# Altium PCB Elevador_TH.PcbDoc
Units mm, origin at the board's own origin, x right, y up, seen from the top; angles counter-clockwise.
Board outline 30.7 x 29.6 mm, 2 copper layers (Top Layer, Bottom Layer), stack 2.103 mm thick; 11 components, 8 nets, 27 pads, 10 vias.
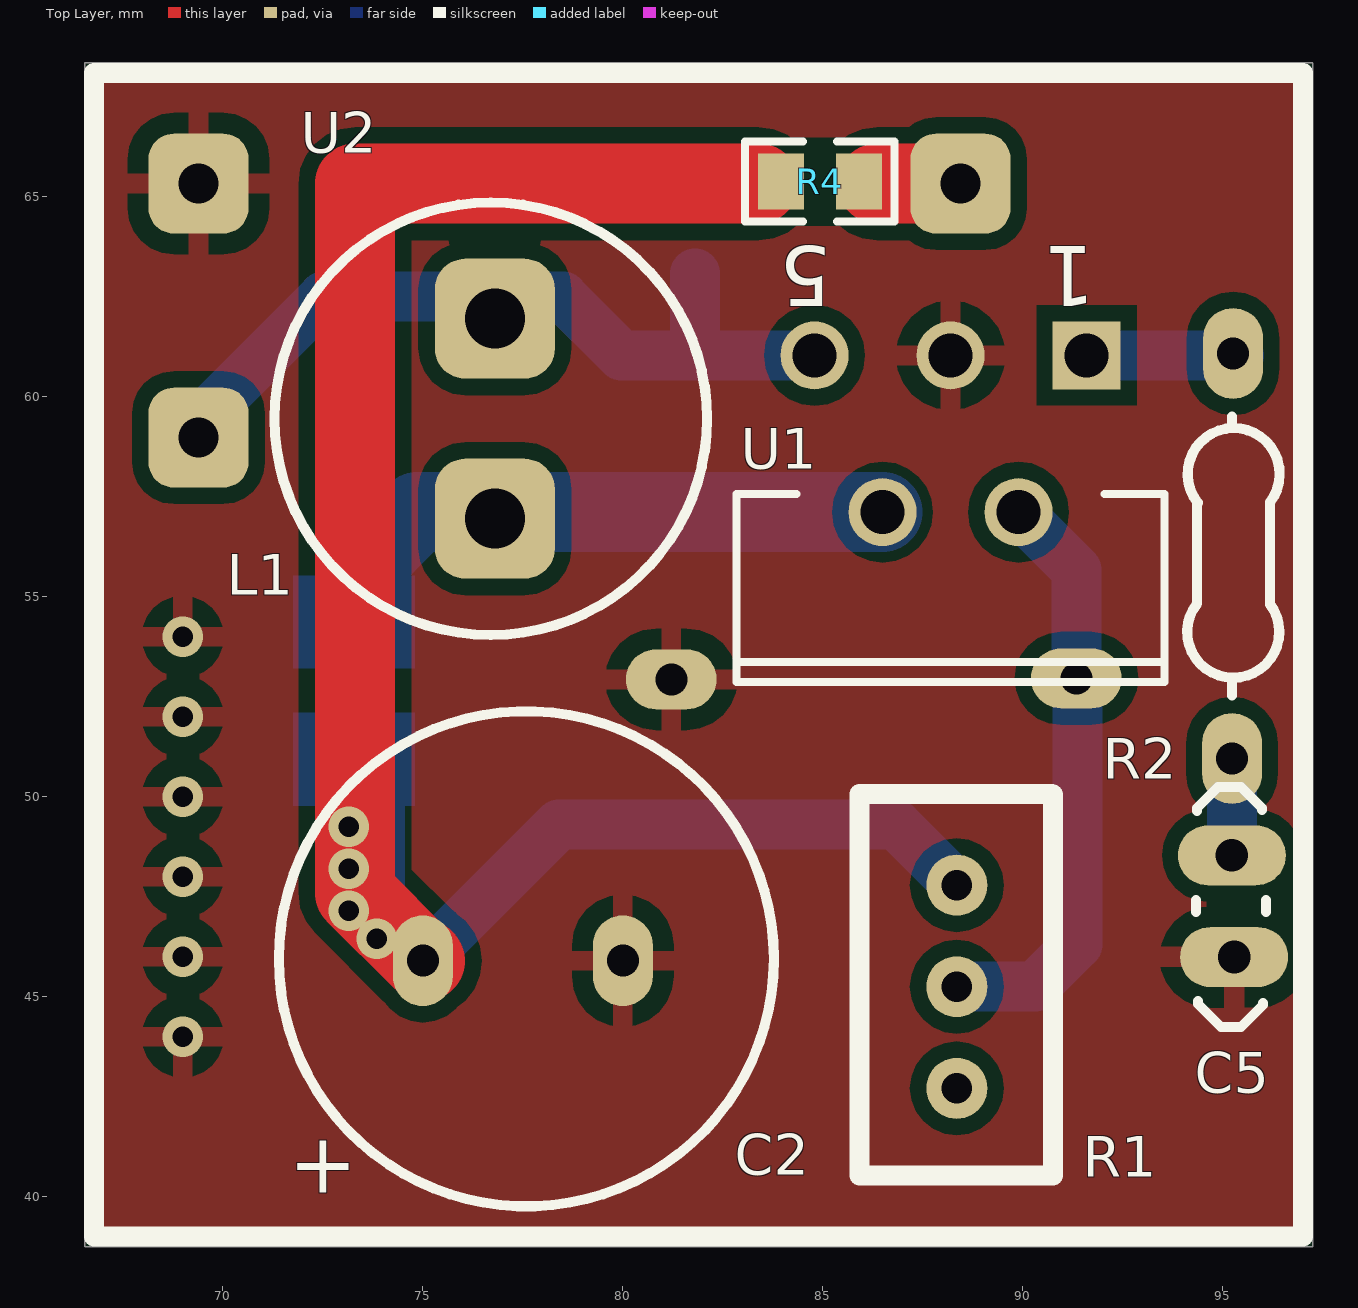
[diagram p0: Top Layer view]
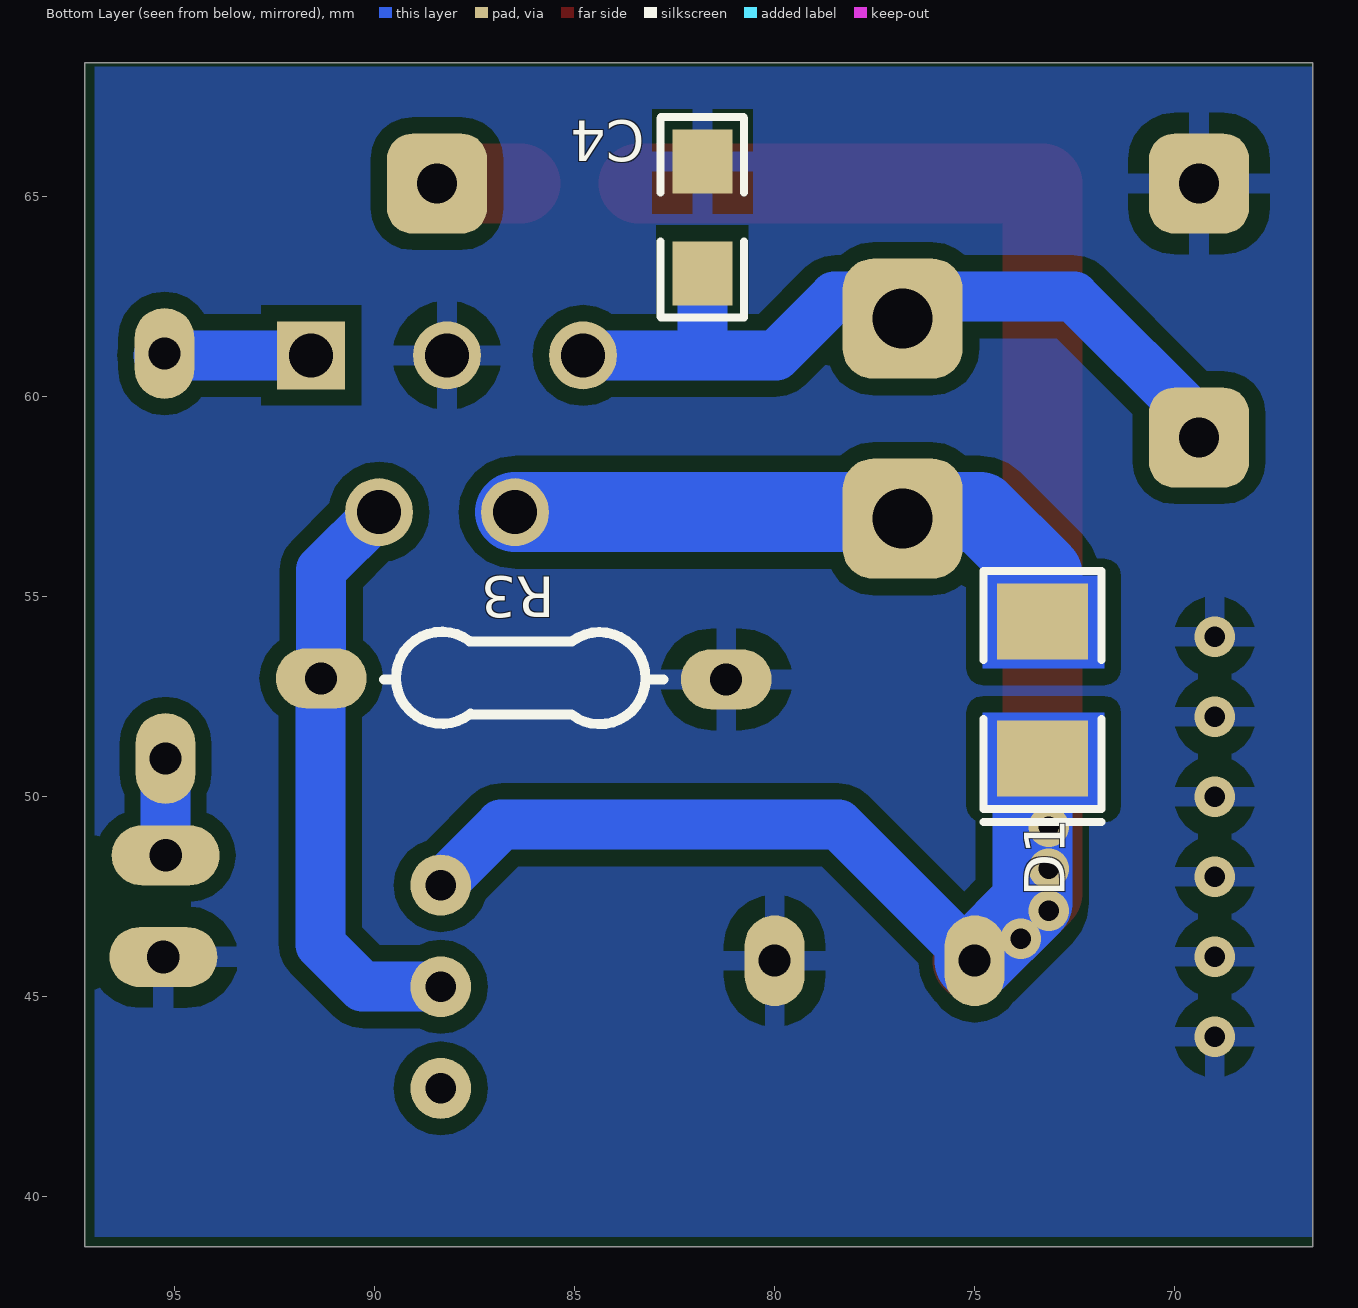
[diagram p1: Bottom Layer view, seen from below]
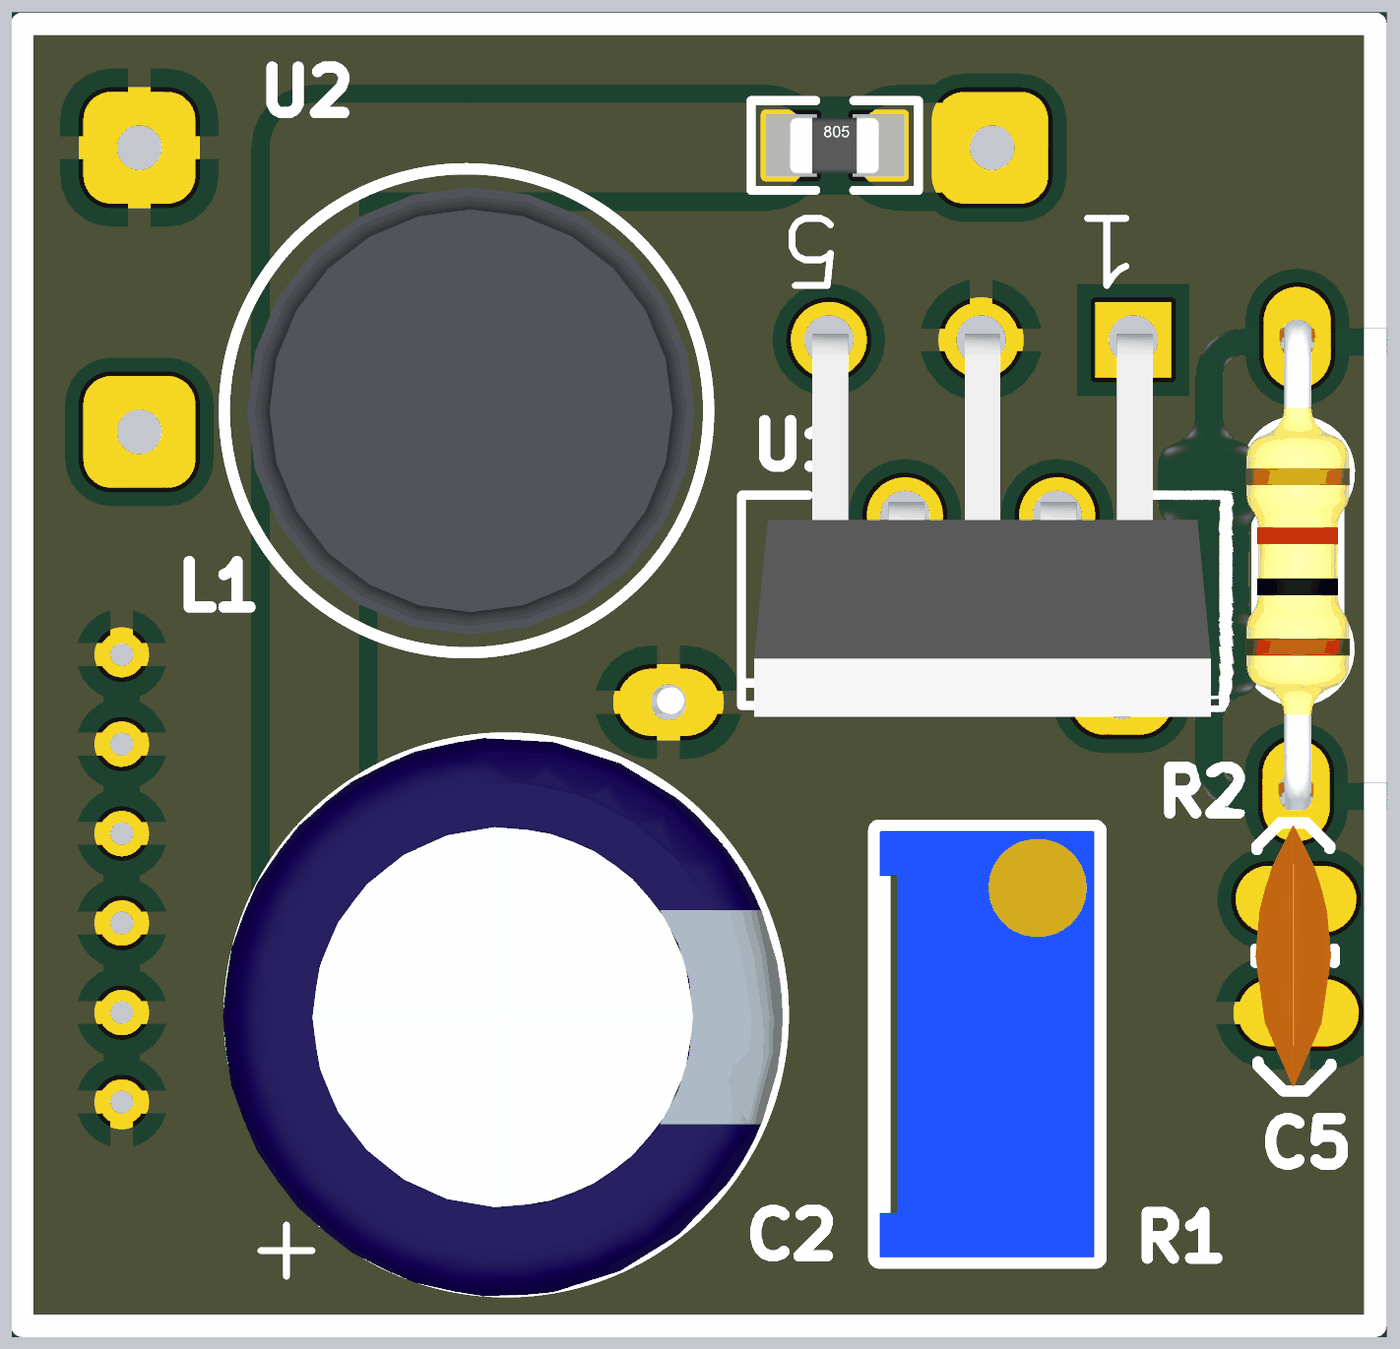
[diagram p2: 3D render of the assembled board from above, using the file's embedded part models]

## Layer stack, top to bottom
Top Solder: solder mask 0.0102, Solder Resist, Dk 3.5
Top Layer: signal copper 0.0356
Dielectric 1: dielectric 2.032, FR-4, Dk 4.8
Bottom Layer: signal copper 0.0356
Bottom Solder: solder mask 0.0102, Solder Resist, Dk 3.5

## Board outline
66.548,38.75 66.548,68.35 97.25,68.35 97.25,38.75

## Design rules (kind name [scope] priority, off if disabled: settings)
Clearance Clearance_Poly [InNet('GND')] p1: gap=0.4
Clearance [All] p2: gap=0.1
ComponentClearance [All] p1: gap=0 collisioncheckmode=3 verticalgap=0 showdistances=FALSE
HoleToHoleClearance [All] p1: gap=0 allowstackedmicrovias=TRUE
MinimumSolderMaskSliver [All] p1: minsoldermaskwidth=0
PolygonConnect [All] p1: connectstyle=Relief reliefconductorwidth=0.508 reliefentries=4 polygonreliefangle="90 Angle" airgapwidth=0.508
RoutingVias [All] p1: holewidth=0.711 width=1.27 viastyle="Through Hole" minholewidth=0.711 minwidth=1.27 maxholewidth=0.711 maxwidth=1.27
SilkToSilkClearance [All] p1: silktosilkclearance=0
SilkToSolderMaskClearance [IsPad] p1: minsilkscreentomaskgap=0 clearancetoexposedcopper=TRUE
SolderMaskExpansion [All] p1: expansion=0.102
Width [All] p1: maxlimit=3 minlimit=0.5 preferedwidth=1
25 further rules are at their usual default settings.

## Classes and differential pairs
component class Elevador: C2 C4 C5 D1 L1 R1 R2 R3 U1

## Components (designator, comment, footprint, x,y, rotation, side; value= is the part's Value field where it differs from the comment)
C2 "> 400uF" "C 12.5 X 25" 77.5,45.9 r0 top
C4 "100nF" "C 1206" 83.718,62.738 r270 bottom
C5 "330nF" "C Lenteja" 95.281,47.269 r90 top
D1 "DIODO" "D 3528" 73.308,52.672 r270 bottom
L1 "100uH" "L SW TH" 76.8,61.95 r270 top
R1 "10k" BOURNS-3596W 88.35,45.25 r90 top
R2 "2.2k" "R THRU" 95.256,56.083 r90 top
R3 "1k" "R THRU" 86.337,52.959 r0 bottom
R4 "1R" "R 0805" 88.85,68.7 r0 top
U1 "UC2577T-ADJ" "TO220 5" 88.496,55.169 r180 top
U2 "PTN04050CAD" PTN04050 67.361,53.645 r0 top

## Footprints (in the part's own frame and the unit in brackets; to place one, negate y for a bottom-side part, rotate by r counter-clockwise, add the part's x,y. Pads: shape width x height; smd on the part's side, far side on the other; paste and mask are expansions set on the pad)
BOURNS-3596W [mil]
  round 60 hole 30: 1(100,0) 2(0,0) 3(-100,0)
  silkscreen extent -186,-94 190,96, body extent -186,-93 189,95, height 455
"C 12.5 X 25" [mm] "Capacitor  Electrolitico Radial 12.5mm diametro  x 25mm de altura (5mm entre pines)"
  oval 1.5x2.27 hole 0.8: 1(-2.5,0) 2(2.5,0)
  silkscreen extent -6.1,-6.14 6.28,6.23, body extent -6.24,-6.25 6.26,6.25, height 25.5
"C 1206" [mm]
  rect 1.6x1.5 smd: 1(-3.144,1.911) 2(-0.344,1.911)
  silkscreen extent -4.25,0.86 0.75,2.95, body extent -3.28,1.11 -0.08,2.71, height 0.77
"C Lenteja" [mm] "Capacitor cerámico lenteja"
  oval 1.5x2.7 hole 0.813: 1(-1.276,0) 2(1.264,0.054)
  silkscreen extent -3.03,-0.8 2.98,0.95, body extent -2.93,-0.74 2.91,0.96, height 6.92
"D 3528" [mm]
  rect 1.9x2.28 smd: 1(-1.715,0) 2(1.715,0)
  silkscreen extent -2.98,-1.48 3.3,1.48
"L SW TH" [mm]
  rrect50% 3x3 hole 1.5: 1(0,0) 2(5,0)
  silkscreen extent -2.91,-5.51 7.91,5.31, body extent -2.5,-5 7.5,5, height 11.63
PTN04050 [mm] "DC Boost de texas instr."
  rrect50% 2.5x2.5 hole 1: 1(2.032,11.684) 2(2.032,5.334) 4(21.082,11.684)
  silkscreen extent -0.58,-14.64 29.64,14.45
"R 0805" [mm]
  rect 1.15x1.4 smd: 1(-4.901,-3.321) 2(-2.946,-3.321)
  silkscreen extent -5.79,-4.32 -2.06,-2.32, body extent -4.93,-3.95 -2.93,-2.7, height 0.78
"R THRU" [mm] "RESISTENCIA DE 1/4 W DE 1K OHM"
  oval 2.27x1.5 hole 0.8: 1(-5.125,0.025) 2(5,0)
  silkscreen extent -3.55,-1.17 3.42,1.14, body extent -5.56,-2.35 5.38,3.13, height 2.93
"TO220 5" [mm]
  rect 1.7x1.7 hole 1.1: 1(-3.097,-5.865)
  round 1.7 hole 1.1: 2(-1.397,-1.945) 3(0.303,-5.865) 4(2.003,-1.945) 5(3.703,-5.865)
  silkscreen extent -5.05,-2.4 5.65,2.3, body extent -4.83,-6 5.37,2.56, height 22

## Part data
C2: library part "C POL", "Capacitor polarizado."
C4 C5: library part C, "Capacitor"
L1: library part L, "Inductor"
R1: library part 3296W-1-502, "TRIMMER 5K OHM 0.5W PC PIN"
R2 R3 R4: library part R, "Resistencia"
U1: "IC REG MULTI CONFIG ADJ 3A TO220"
U2: "REG SW 5-15V 2.4A HORZ T/H"

## Via types
v1: diameter 1.016, hole 0.508, Top Layer to Bottom Layer, 10 vias

## Nets (pads, with @x,y where several pads share a name; then routed paths per layer and width w, separated by ;. In a path a pad name is that pad's centre, name@x,y a point inside that pad or via, vN(x,y) a via of type N, cw(c..) or ccw(c..) an arc to the next point about the centre after c; other vN are vias at no path point)
+VIN: C4.2 L1.1 U1.5 U2.2 | length 19.7
  Bottom Layer w1.25: U2.2 69.393,59.371 72.522,62.5 78.5,62.5 79.966,61.034 U1.5 ; 81.807,61.047 C4.2
+VOUT: R4.2 U2.4 | length 2.1
  Top Layer w2: R4.2@86.35,65.329 U2.4
GND: C2.2 C4.1 C5.1 R3.1 U1.3 U2.1
  other v1: 69,44 69,46 69,48 69,50 69,52 69,54
NetC2_1: C2.1 D1.2 R1.1 R4.1 | length 50.8
  Top Layer w2: C2.1 73.304,47.596 73.304,65.329 R4.1@83.4,65.329 ; C2.1@75.027,45.927 C2.1@75.057,45.898
  Bottom Layer w1.25: C2.1 78.4,49.3 86.84,49.3 R1.1
  Bottom Layer w2: D1.2@73.558,50.457 73.558,47.342 C2.1
  other v1: 73.85,46.45 73.15,47.15 73.15,48.2 73.15,49.25
NetC5_2: C5.2 R2.1 | length 2.4
  Bottom Layer w1.25: C5.2 R2.1@95.227,50.955
NetD1_1: D1.1 L1.2 U1.4 | length 15.4
  Bottom Layer w1.25: L1.2@76.114,57.114 L1.2@76.5,57.5
  Bottom Layer w2: D1.1 73.308,55.558 74.864,57.114 L1.2@76.114,57.114 ; L1.2@76.307,57.114 U1.4
NetR1_2: R1.2 R3.2 U1.2 | length 14.9
  Bottom Layer w1.25: R1.2 90.3,45.25 91.361,46.311 91.361,52.936 R3.2 91.337,55.67 U1.2
NetR2_2: R2.2 U1.1 | length 3.9
  Bottom Layer w1.25: U1.1 R2.2@95.407,61.034 ; R2.2@95.207,61.034 R2.2
pads on no net: R1.3

## Polygon pours and split planes (outlines as drawn)
GND on Top Layer "Bottom Layer-No Net" (solid, pour order 4): 66.548,68.25 66.548,39 97,39 97,68.25
GND on Bottom Layer "Bottom Layer-No Net" (solid, pour order 3): 66.548,68.25 66.548,39 97,39 97,68.25

## Other copper
Bottom Layer:
  region net NetC2_1: 74.8,49.77 74.8,52.107 71.752,52.107 71.752,49.77
  region net NetD1_1: 74.8,53.2 74.8,55.537 71.752,55.537 71.752,53.2

## Silkscreen, mask and mechanical layers (free items; w line width, h text height)
Mechanical 1:
  the board outline again, w0.025

## Text inside footprints (layer, text, board x,y; h text height)
C2: Top Overlay "+" at 71.65,40.1 h1.5
U1: Top Overlay "5" at 85.213,63.759 h1.5 r180; Top Overlay "1" at 91.813,63.759 h1.5 r180